# Altium PCB JUMP_PI.PcbDoc
Units mm, origin at the board's own origin, x right, y up, seen from the top; angles counter-clockwise.
Board outline 62.86 x 95.88 mm, 2 copper layers (Top Layer, Bottom Layer); 29 components, 34 nets, 129 pads, 4 vias.
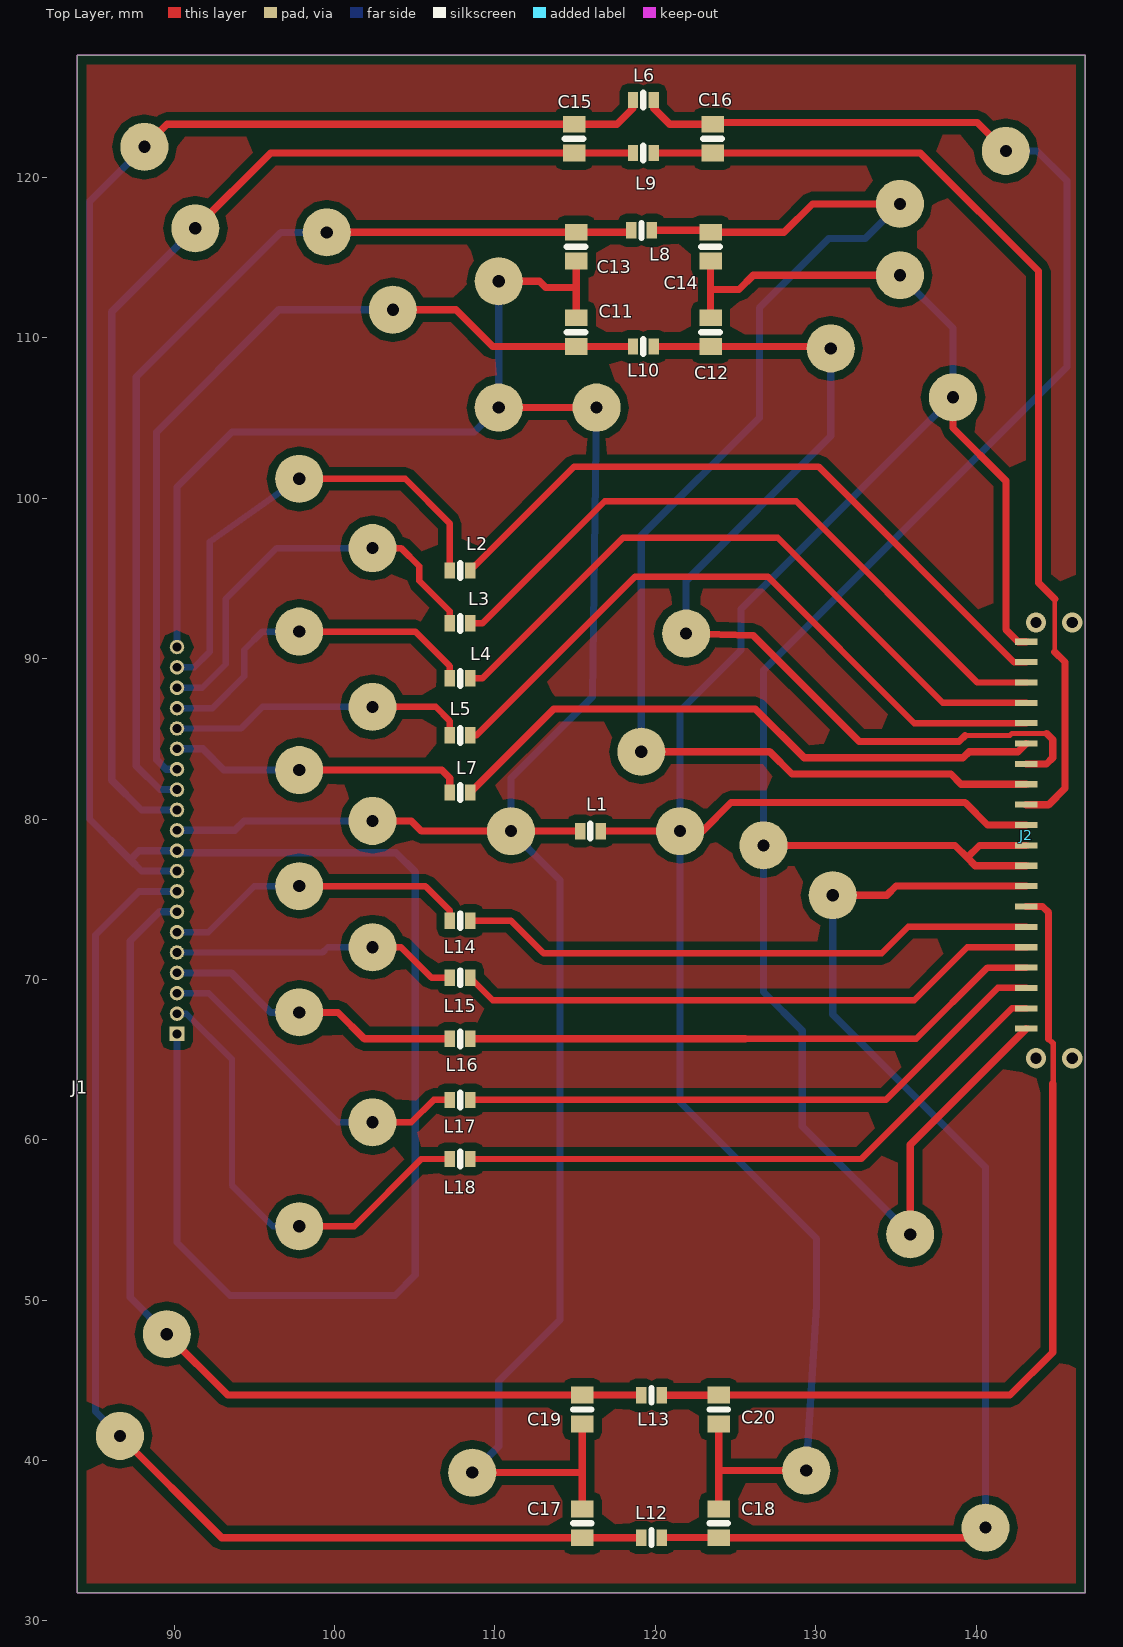
[diagram p0: Top Layer view]
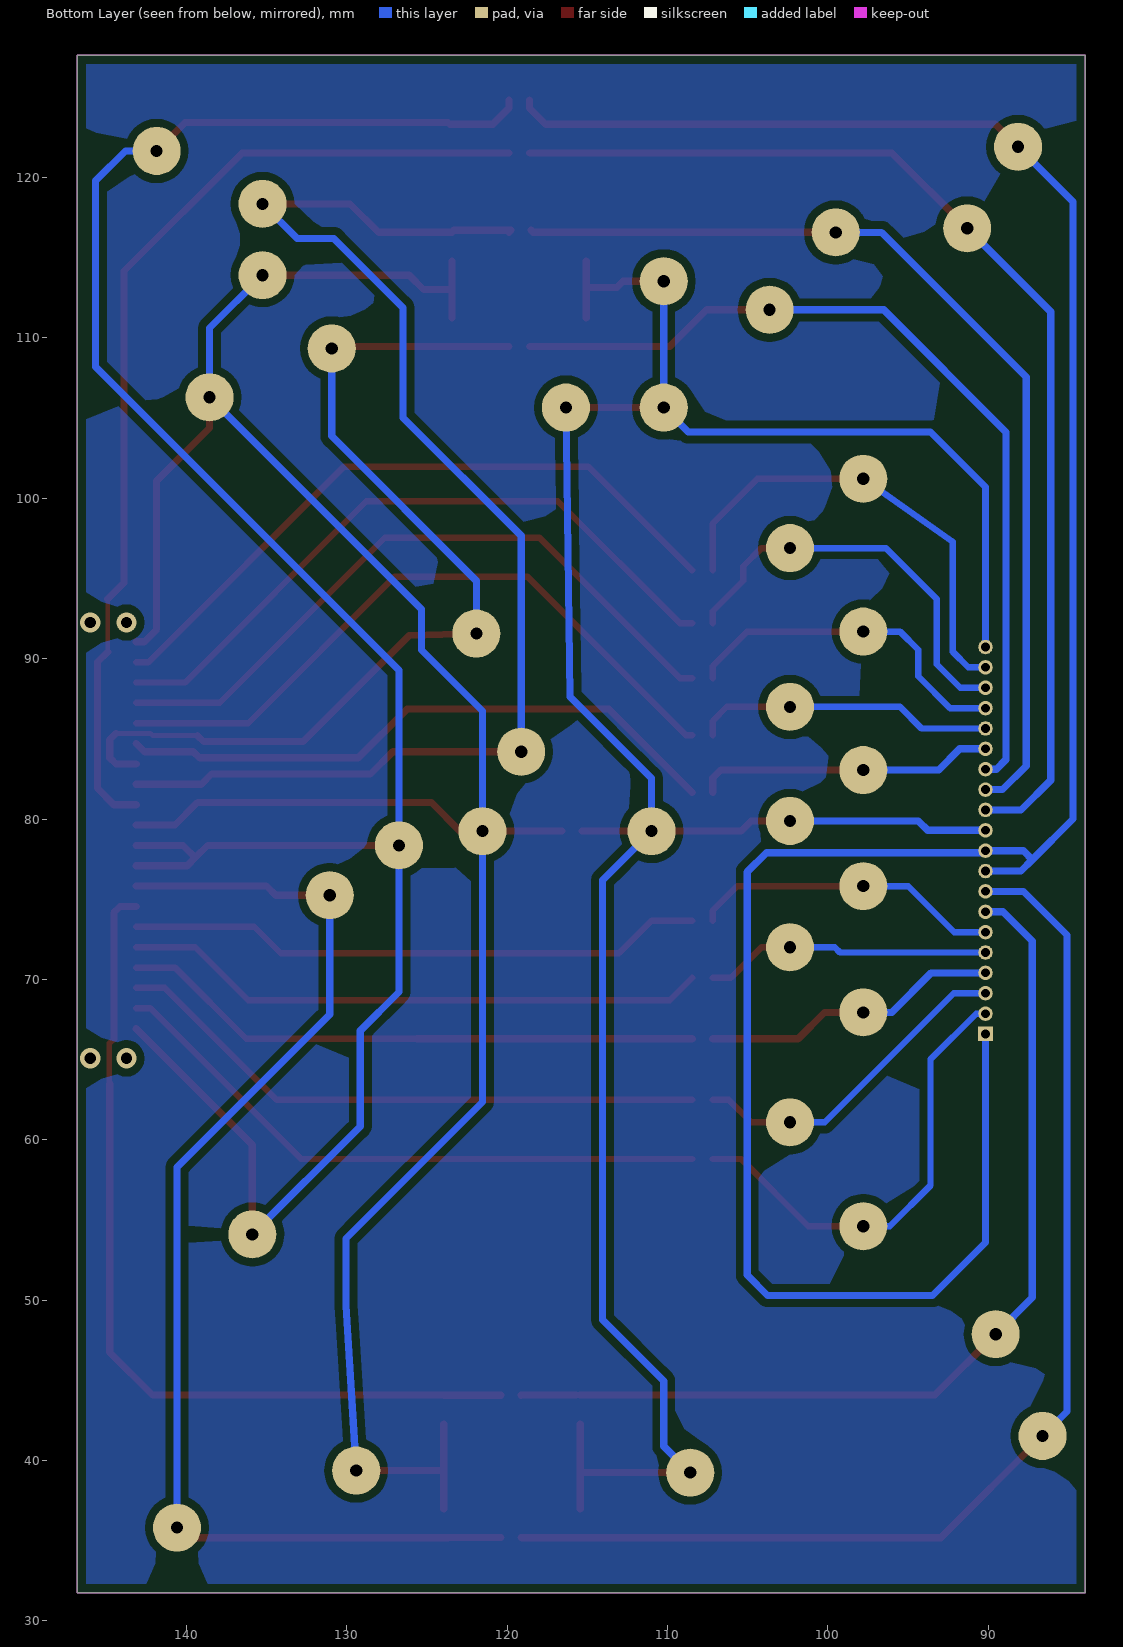
[diagram p1: Bottom Layer view, seen from below]
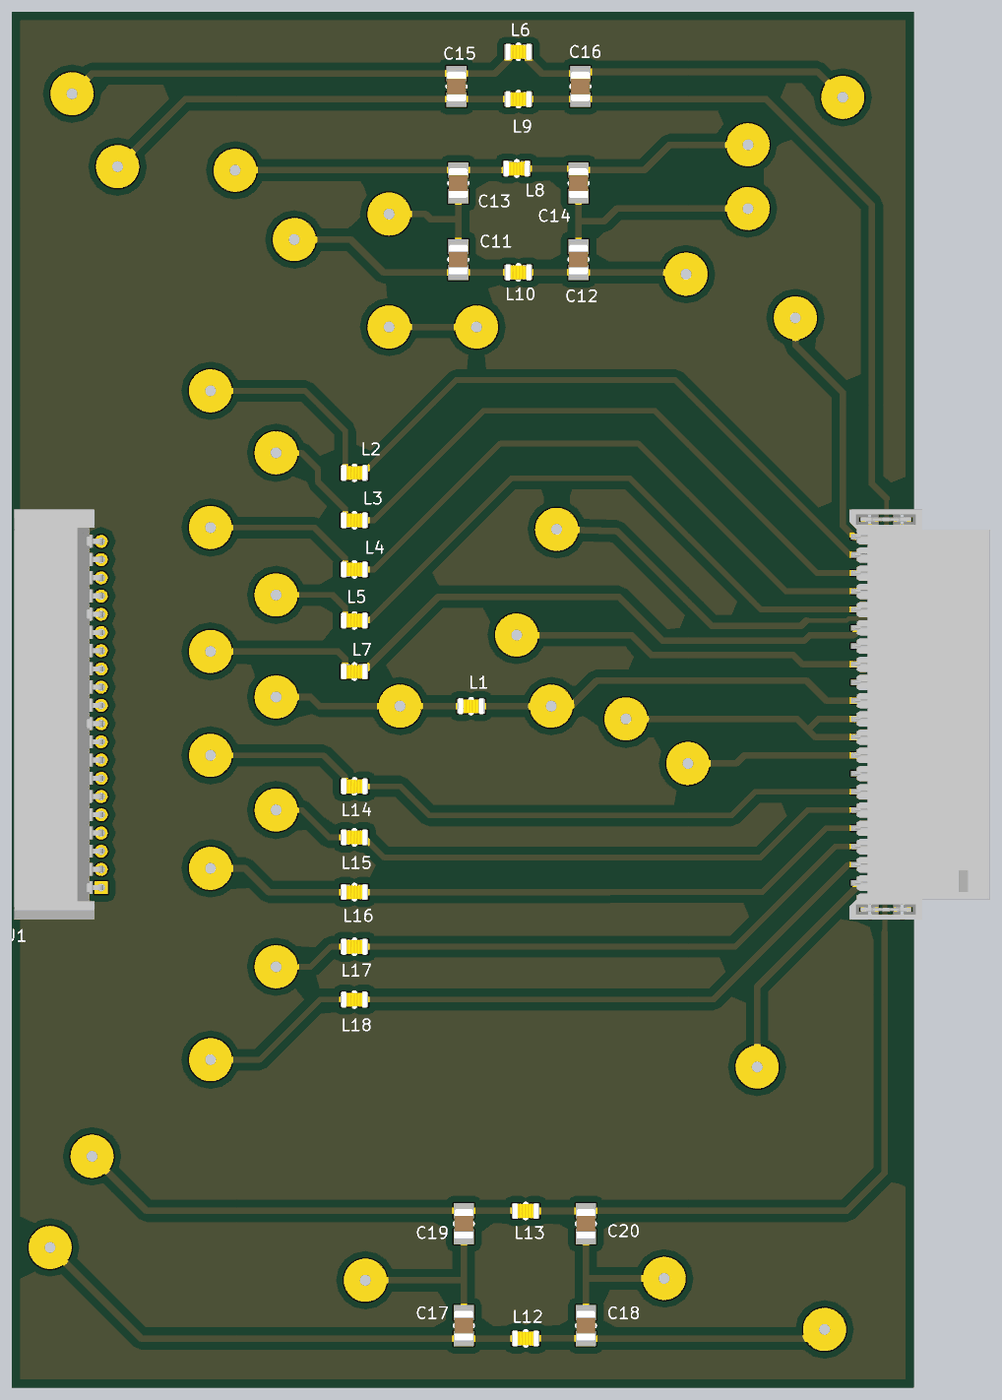
[diagram p2: 3D render of the assembled board from above, using the file's embedded part models]

## Layer stack, top to bottom
Top Solder: solder mask 0.0102, Solder Resist, Dk 3.5
Top Layer: signal copper 0.0356
Dielectric 1: dielectric 0.32, FR-4, Dk 4.8
Bottom Layer: signal copper 0.0356
Bottom Solder: solder mask 0.0102, Solder Resist, Dk 3.5

## Board outline
83.947,31.75 146.812,31.75 146.812,127.635 83.947,127.635

## Design rules (kind name [scope] priority, off if disabled: settings)
Clearance [All] p1: gap=0.254 ignorepadtopadclearanceinfootprint=FALSE except(0: Arc-Hole Track-Hole SMDPad-Hole THPad-Hole Via-Hole Fill-Hole Poly-Hole Region-Hole Text-Hole; 0.5: Arc-Fill Arc-Poly Arc-Region Track-Fill Track-Poly Track-Region SMDPad-Fill SMDPad-Poly SMDPad-Region THPad-Fill THPad-Poly THPad-Region Via-Fill Via-Poly Via-Region Fill-Fill Fill-Poly Fill-Region Poly-Poly Poly-Region Region-Region)
MinimumSolderMaskSliver [All] p1: minsoldermaskwidth=0.127
PolygonConnect [All] p1: connectstyle=Relief reliefconductorwidth=0.254 reliefentries=4 polygonreliefangle="90 Angle" airgapwidth=0.254
RoutingVias [All] p1: holewidth=0.711 width=1.27 viastyle="Through Hole" minholewidth=0.711 minwidth=1.27 maxholewidth=0.711 maxwidth=1.27
SilkToSolderMaskClearance [IsPad] p1: minsilkscreentomaskgap=0.07 clearancetoexposedcopper=TRUE
SolderMaskExpansion [All] p1: expansion=0.102
Width [All] p1: maxlimit=1 minlimit=0.1 preferedwidth=0.254 minimp=50.000000 maximp=50.000000 favimp=50.000000
28 further rules are at their usual default settings.

## Classes and differential pairs
component class JUMP_PI: C12 C13 C15 C16 C17 C18 C19 C20 J1 J2 L1 L2 L3 L4 L5 L6 L7 L8 L9 L12 L13 L14 L15 L16 L17 L18

## Components (designator, comment, footprint, x,y, rotation, side; value= is the part's Value field where it differs from the comment)
C11 "1.2nF" CAPC2012X135N 115.062,110.363 r270 top
C12 "1.2nF" CAPC2012X135N 123.444,110.363 r270 top
C13 "1.2nF" CAPC2012X135N 115.062,115.697 r90 top
C14 "1.2nF" CAPC2012X135N 123.444,115.697 r90 top
C15 "1.2nF" CAPC2012X135N 114.935,122.428 r270 top
C16 "1.2nF" CAPC2012X135N 123.571,122.428 r270 top
C17 "1.2nF" CAPC2012X135N 115.443,36.079 r270 top
C18 "1.2nF" CAPC2012X135N 123.952,36.079 r270 top
C19 "1.2nF" CAPC2012X135N 115.443,43.18 r90 top
C20 "1.2nF" CAPC2012X135N 123.952,43.18 r90 top
J1 "Header 20" SAMTEC_TFM-120-01-L-S-RA 89.69,78.669 r90 top
J2 "Header 20" SAMTEC_SFM-120-02-S-SH 144.099,78.669 r90 top
L1 "390nH" IND_ABRACON_AISC-0603 115.951,79.248 r0 top
L2 "390nH" IND_ABRACON_AISC-0603 107.823,95.504 r0 top
L3 "390nH" IND_ABRACON_AISC-0603 107.823,92.202 r0 top
L4 "390nH" IND_ABRACON_AISC-0603 107.823,88.773 r0 top
L5 "390nH" IND_ABRACON_AISC-0603 107.823,85.217 r0 top
L6 "390nH" IND_ABRACON_AISC-0603 119.253,124.841 r0 top
L7 "390nH" IND_ABRACON_AISC-0603 107.823,81.661 r0 top
L8 "390nH" IND_ABRACON_AISC-0603 119.137,116.713 r0 top
L9 "390nH" IND_ABRACON_AISC-0603 119.253,121.539 r0 top
L10 "390nH" IND_ABRACON_AISC-0603 119.253,109.474 r0 top
L12 "390nH" IND_ABRACON_AISC-0603 119.761,35.19 r0 top
L13 "390nH" IND_ABRACON_AISC-0603 119.761,44.069 r0 top
L14 "390nH" IND_ABRACON_AISC-0603 107.823,73.66 r0 top
L15 "390nH" IND_ABRACON_AISC-0603 107.823,70.104 r0 top
L16 "390nH" IND_ABRACON_AISC-0603 107.823,66.294 r0 top
L17 "390nH" IND_ABRACON_AISC-0603 107.823,62.484 r0 top
L18 "390nH" IND_ABRACON_AISC-0603 107.823,58.801 r0 top

## Footprints (in the part's own frame and the unit in brackets; to place one, negate y for a bottom-side part, rotate by r counter-clockwise, add the part's x,y. Pads: shape width x height; smd on the part's side, far side on the other; paste and mask are expansions set on the pad)
CAPC2012X135N [mm] "Chip Capacitor, Body 2.0x1.25mm, IPC Medium Density"
  rect 1.05x1.4 smd: 1(-0.9,0) 2(0.9,0)
  silkscreen extent 0,-0.58 0,0.58, body extent -1.05,-0.67 1.05,0.68, height 1.25
IND_ABRACON_AISC-0603 [mm] "Inductor, Molded Body; 1.8mm L X 1.12mm W, AISC-0603 Serie"
  rect 0.64x1.02 smd: 1(-0.64,0) 2(0.64,0)
  silkscreen extent 0,-0.45 0,0.45, body extent -0.9,-0.56 0.9,0.56, height 1
SAMTEC_SFM-120-02-S-SH [mm]
  rect 0.38x1.4 smd: 1(-11.74,0.97) 2(-10.47,0.97) 3(-9.2,0.97) 4(-7.93,0.97) 5(-6.66,0.97) 6(-5.39,0.97) 7(-4.12,0.97) 8(-2.85,0.97) 9(-1.58,0.97) 10(-0.31,0.97) 11(0.96,0.97) 12(2.23,0.97) 13(3.5,0.97) 14(4.77,0.97) 15(6.04,0.97) 16(7.31,0.97) 17(8.58,0.97) 18(9.85,0.97) 19(11.12,0.97) 20(12.39,0.97)
  body extent -14.29,-8 14.29,1.78, height 1.4
SAMTEC_TFM-120-01-L-S-RA [mm]
  rect 0.905x0.905 hole 0.54: 1(-12.07,-0.48)
  round 0.905 hole 0.54: 2(-10.8,-0.48) 3(-9.53,-0.48) 4(-8.26,-0.48) 5(-6.99,-0.48) 6(-5.72,-0.48) 7(-4.45,-0.48) 8(-3.18,-0.48) 9(-1.91,-0.48) 10(-0.64,-0.48) 11(0.63,-0.48) 12(1.9,-0.48) 13(3.17,-0.48) 14(4.44,-0.48) 15(5.71,-0.48) 16(6.98,-0.48) 17(8.25,-0.48) 18(9.52,-0.48) 19(10.79,-0.48) 20(12.06,-0.48)
  body extent -14.29,-0.63 14.29,5.59, height 4.46

## Part data
C11 C12 C13 C14 C15 C16 C17 C18 C19 C20: library part CC0805_1.2NF_50V_10%_X7R, "Non-polarised capacitor", Case=0805, Manufacturer=GENERIC, Manufacturer1 ComponentHeight=1.35mm, Manufacturer1 Example=PHYCOMP, Manufacturer1 Part Number=223858615624, Tolerance=±10%, Voltage=50V, Author="CERN DEM JLC", Component Type=Standard, CreateDate=03/12/2007, HelpURL=\\cern.ch\dfs\Applications\Altium\Datasheets\CC0805_X7R_PHYCOMP.pdf, LatestRevisionDate=03/12/2007, Manufacturer Part Number=CC0805_1.2NF_50V_10%_X7R, Mounted=Yes, Part Description="SMD Multilayer Chip Ceramic Capacitor", Part Number=CC0805_1.2NF_50V_10%_X7R, Pin Count=2, Sense=No, SMD=Yes, Socket=No, Status=Preferred, TC=X7R
J1: library part SAMTEC_TFM-120-01-L-S-RA, "Connector 20 Male", Manufacturer=SAMTEC, Manufacturer Part Number=TFM-120-01-L-S-RA, Author="LNLS DIG FCS", ComponentHeight=4.45mm, Component Type=Standard, CreateDate=30/06/2016, Family="Header 20", HelpURL=http://suddendocs.samtec.com/catalog_english/tfm.pdf, LatestRevisionDate=30/06/2016, Mounted=Yes, Part Description="20 Contacts - Pitch 1.27mm - Single Row Right Angle Header", Part Number=SAMTEC_TFM-120-01-L-S-RA, Pin Count=20, PressFit=No, Sense=No, SMD=No, Socket=No, Status=None
J2: library part SAMTEC_SFM-120-02-S-SH, "Connector 20 Female", Manufacturer=SAMTEC, Manufacturer Part Number=SFM-120-02-S-SH, Author="LNLS DIG FCS", ComponentHeight=2.41mm, Component Type=Standard, CreateDate=06/07/2016, Family="Header 20", HelpURL=http://suddendocs.samtec.com/catalog_english/sfm.pdf, LatestRevisionDate=06/07/2016, Mounted=Yes, Part Description="20 Contacts - Pitch 1.27mm - Single Row Right Angle Header", Part Number=SAMTEC_SFM-120-02-S-SH, Pin Count=20, PressFit=No, Sense=No, SMD=Yes, Socket=No, Status=None
L1 L2 L3 L4 L5 L6 L7 L8 L9 L10 L12 L13 L14 L15 L16 L17 L18: library part IND_390NH_5%_ABRACON_AISC-0603, "Inductor", Case=0603, Manufacturer=ABRACON, Manufacturer Part Number=AISC-0603-R39-J, Power=120mA, Resistance=2.9R, Tolerance=±5%, Author="CERN DEM JLC", ComponentHeight=1.02mm, Component Type=Standard, CreateDate=23/09/2010, HelpURL=\\cern.ch\dfs\Applications\Altium\Datasheets\IND_ABRACON_AISC-0603.pdf, LatestRevisionDate=23/09/2010, Mounted=Yes, Part Description="SMD Ceramic Wire-Wound Chip Inductor", Part Number=IND_390NH_5%_ABRACON_AISC-0603, Pin Count=2, Sense=No, SMD=Yes, Socket=No, Status=None

## Free pads (board coordinates)
  round 3 hole 0.762: 3(108.585,39.243) 4(119.126,84.201) 4(121.539,79.248) 4(121.92,91.567) 4(126.746,78.359) 4(129.413,39.37) 4(130.937,109.347) 4(131.064,75.253) 4(135.255,113.919) 4(135.255,118.364) 4(135.89,54.102) 4(138.557,106.299) 4(140.589,35.814) 4(141.859,121.666) 5(110.236,113.538) 5(110.998,79.248) 5(116.332,105.664) 6(86.614,41.529) 6(88.138,121.92) 6(89.535,47.879) 6(91.313,116.84) 6(97.79,54.61) 6(97.79,67.945) 6(97.79,75.819) 6(97.79,83.058) 6(97.79,91.694) 6(97.79,101.219) 6(99.508,116.586) 6(102.362,61.087) 6(102.362,72.009) 6(102.362,79.883) 6(102.362,86.995) 6(102.362,96.901) 6(103.632,111.76) 6(110.236,105.664)

## Via types
v1: diameter 1.27, hole 0.711, Top Layer to Bottom Layer, 4 vias

## Nets (pads, with @x,y where several pads share a name; then routed paths per layer and width w, separated by ;. In a path a pad name is that pad's centre, name@x,y a point inside that pad or via, vN(x,y) a via of type N, cw(c..) or ccw(c..) an arc to the next point about the centre after c; other vN are vias at no path point)
+3V_RFFE: C20.2 J2.7 L13.2 | length 54.6
  Top Layer w0.35: 144.526,66.294 144.803,66.017 144.803,63.523 144.78,63.5
  Top Layer w0.45: L13.2 123.941,44.069 C20.2 142.124,44.08 144.78,46.736 144.78,63.5 ; J2.7 144.145,74.549 144.526,74.168 144.526,66.294
+3VRF_CON: C19.2 J1.7 L13.1 pad.6@89.535,47.879 | length 60
  Top Layer w0.45: pad.6@89.535,47.879 93.334,44.08 C19.2 ; C19.2@115.697,44.08 119.11,44.08 L13.1
  Bottom Layer w0.45: pad.6@89.535,47.879 87.249,50.165 87.249,72.39 89.078,74.219 J1.7
+5V_RFFE: C12.2 J2.14 L10.2 pad.4@121.92,91.567 pad.4@130.937,109.347 | length 61.5
  Top Layer w0.3: 139.319,85.217 142.113,85.217 142.24,85.344 144.399,85.344
  Top Layer w0.45: L10.2 123.433,109.474 C12.2 pad.4@130.937,109.463 ; pad.4@121.92,91.567 126.111,91.44 132.715,84.836 138.938,84.836 139.319,85.217 ; J2.14 144.399,83.439 144.78,83.82 144.78,84.963 144.399,85.344
  Bottom Layer w0.45: pad.4@121.92,91.567 121.92,94.869 130.937,103.886 pad.4@130.937,109.347
+5VD_CON: C15.2 J1.12 L9.1 pad.6@91.313,116.84 | length 70.7
  Top Layer w0.45: pad.6@91.313,116.84 96.001,121.528 C15.2 114.946,121.539 L9.1
  Bottom Layer w0.45: J1.12 87.96,80.569 86.106,82.423 86.106,111.633 pad.6@91.313,116.84
+5VD_RFFE: C16.2 J2.12 L9.2 | length 62.8
  Top Layer w0.3: 144.907,90.424 144.907,93.726
  Top Layer w0.45: L9.2 123.56,121.539 C16.2 136.536,121.528 143.891,114.173 143.891,94.742 144.907,93.726 ; J2.12 144.526,80.899 145.542,81.915 145.542,89.789 144.907,90.424
+5VRF_CON: C11.2 J1.14 L10.1 pad.6@103.632,111.76 | length 55.8
  Top Layer w0.45: pad.6@103.632,111.76 107.569,111.76 109.866,109.463 C11.2 115.073,109.474 L10.1
  Bottom Layer w0.45: J1.14 89.484,83.109 88.9,83.693 88.9,104.14 96.52,111.76 pad.6@103.632,111.76
A+5V_CON: C13.2 J1.13 L8.1 pad.6@99.508,116.586 | length 62.1
  Top Layer w0.45: pad.6@99.508,116.586 99.519,116.597 C13.2 118.381,116.597 L8.1
  Bottom Layer w0.45: J1.13 89.103,81.839 87.63,83.312 87.63,107.569 96.647,116.586 pad.6@99.508,116.586
A+5V_RFFE: C14.2 J2.13 L8.2 pad.4@119.126,84.201 pad.4@135.255,118.364 | length 83.4
  Top Layer w0.45: pad.4@119.126,84.201 127.127,84.201 128.524,82.804 138.43,82.804 139.065,82.169 J2.13 ; L8.2@119.893,116.597 L8.2 123.328,116.713 C14.2 128.027,116.597 129.794,118.364 pad.4@135.255,118.364
  Bottom Layer w0.45: pad.4@119.126,84.201 119.126,97.663 126.492,105.029 126.492,111.887 130.81,116.205 133.096,116.205 pad.4@135.255,118.364
AGND_CON: C15.1 J1.1 J1.9 J1.10 L6.1 pad.6@88.138,121.92 | length 155.7
  Top Layer w0.45: pad.6@88.138,121.92 89.546,123.328 C15.1 117.613,123.328 118.613,124.328 L6.1
  Bottom Layer w0.45: pad.6@88.138,121.92 84.709,118.491 84.709,80.01 87.249,77.47 ; J1.1 90.17,53.594 93.472,50.292 103.759,50.292 105.029,51.562 105.029,76.708 103.833,77.904 90.17,77.904 J1.10 87.808,78.029 87.249,77.47 ; J1.9 87.96,76.759 87.249,77.47
C+5V_CON: C17.2 J1.8 L12.1 pad.6@86.614,41.529 | length 73.2
  Top Layer w0.45: pad.6@86.614,41.529 92.964,35.179 C17.2 119.11,35.179 L12.1
  Bottom Layer w0.45: pad.6@86.614,41.529 85.09,43.053 85.09,72.771 87.808,75.489 J1.8
C+5V_RFFE: C18.2 J2.8 L12.2 pad.4@131.064,75.253 pad.4@140.589,35.814 | length 76.1
  Top Layer w0.45: L12.2 123.687,35.19 123.698,35.179 C18.2 139.954,35.179 pad.4@140.589,35.814 ; pad.4@131.064,75.253 134.435,75.253 135.001,75.819 J2.8
  Bottom Layer w0.45: pad.4@131.064,75.253 131.064,67.818 140.589,58.293 pad.4@140.589,35.814
CLK_CON: J1.5 L15.1 pad.6@102.362,72.009 | length 17.9
  Top Layer w0.4: pad.6@102.362,72.009 104.14,72.009 106.045,70.104 L15.1
  Bottom Layer w0.4: J1.5 99.238,71.679 99.568,72.009 pad.6@102.362,72.009
CLK_RFFE: J2.5 L15.2 | length 36.6
  Top Layer w0.4: L15.2 109.86,68.707 136.144,68.707 139.446,72.009 J2.5
CS1_RFFE: J2.16 L5.2 | length 42.6
  Top Layer w0.4: L5.2 108.839,85.217 118.745,95.123 127,95.123 136.144,85.979 J2.16
CSAC_CON: J1.16 L5.1 pad.6@102.362,86.995 | length 18.8
  Top Layer w0.4: pad.6@102.362,86.995 106.299,86.995 107.183,86.111 L5.1
  Bottom Layer w0.4: J1.16 94.158,85.649 95.504,86.995 pad.6@102.362,86.995
DATAA_CON: J1.3 L17.1 pad.6@102.362,61.087 | length 20.9
  Top Layer w0.4: pad.6@102.362,61.087 104.775,61.087 106.172,62.484 L17.1
  Bottom Layer w0.4: J1.3 92.151,69.139 100.203,61.087 pad.6@102.362,61.087
DATAA_RFFE: J2.3 L17.2 | length 37.6
  Top Layer w0.4: L17.2 134.366,62.484 141.351,69.469 J2.3
DATAC_CON: J1.2 L18.1 pad.6@97.79,54.61 | length 28.9
  Top Layer w0.4: pad.6@97.79,54.61 101.219,54.61 105.41,58.801 L18.1
  Bottom Layer w0.4: J1.2 90.754,67.869 93.599,65.024 93.599,57.15 96.139,54.61 pad.6@97.79,54.61
DATAC_RFFE: J2.2 L18.2 | length 38.6
  Top Layer w0.4: L18.2 132.842,58.801 142.24,68.199 J2.2
DIN_RFFE: J2.17 L4.2 | length 42.6
  Top Layer w0.4: L4.2 109.22,88.773 117.983,97.536 127.635,97.536 137.922,87.249 J2.17
DOUT_RFFE: J2.18 L3.2 | length 42.5
  Top Layer w0.4: L3.2 109.22,92.202 116.84,99.822 128.778,99.822 140.081,88.519 J2.18
HEAT_RFFE: J2.15 L7.2 | length 38.5
  Top Layer w0.45: L7.2 113.67,86.868 126.238,86.868 129.286,83.82 139.192,83.82 139.573,84.201 142.621,84.201 J2.15
HEATAC_CON: J1.15 L7.1 pad.6@97.79,83.058 | length 18.7
  Top Layer w0.45: pad.6@97.79,83.058 106.68,83.058 107.183,82.555 L7.1
  Bottom Layer w0.45: J1.15 91.77,84.379 93.091,83.058 pad.6@97.79,83.058
LE_CON: J1.6 L14.1 pad.6@97.79,75.819 | length 19.5
  Top Layer w0.4: pad.6@97.79,75.819 105.664,75.819 107.183,74.3 L14.1
  Bottom Layer w0.4: J1.6 92.126,72.949 94.996,75.819 pad.6@97.79,75.819
LE_RFFE: J2.6 L14.2 | length 36.2
  Top Layer w0.4: L14.2 110.998,73.66 113.03,71.628 134.112,71.628 135.763,73.279 J2.6
MISO1_CON: J1.18 L3.1 pad.6@102.362,96.901 | length 25.9
  Top Layer w0.4: pad.6@102.362,96.901 104.14,96.901 105.283,95.758 105.283,94.869 107.183,92.969 L3.1
  Bottom Layer w0.4: J1.18 91.745,88.189 93.218,89.662 93.218,93.726 96.393,96.901 pad.6@102.362,96.901
MOSI1_CON: J1.17 L4.1 pad.6@97.79,91.694 | length 21.6
  Top Layer w0.4: pad.6@97.79,91.694 105.029,91.694 107.183,89.54 L4.1
  Bottom Layer w0.4: J1.17 92.38,86.919 94.361,88.9 94.361,90.551 95.504,91.694 pad.6@97.79,91.694
RFGND_CON: C11.1 C13.1 C17.1 C19.1 J1.11 J1.20 L1.1 pad.3 pad.5 pad.6@102.362,79.883 pad.6@110.236,105.664 | length 164.4
  Top Layer w0.45: pad.6@102.362,79.883 104.775,79.883 105.41,79.248 110.998,79.248 L1.1 ; pad.3 115.443,39.243 ; pad.6@110.236,105.664 pad.5@116.332,105.664 ; pad.5@110.236,113.538 112.776,113.538 113.157,113.157 115.062,113.157 ; C11.1 115.062,113.157 ; C13.1 115.062,113.157 ; C17.1 115.443,38.862 C19.1
  Bottom Layer w0.45: J1.11 93.777,79.299 94.361,79.883 pad.6@102.362,79.883 ; J1.20 90.17,100.711 93.599,104.14 108.712,104.14 110.236,105.664 pad.5@110.236,113.538 ; pad.3 110.236,40.894 110.236,44.958 114.046,48.768 114.046,76.2 110.998,79.248 110.998,82.55 116.078,87.63 pad.5@116.332,105.664
RFGND_RFFE: C12.1 C14.1 C18.1 C20.1 J2.11 J2.20 L1.2 pad.4@121.539,79.248 pad.4@129.413,39.37 pad.4@135.255,113.919 pad.4@138.557,106.299 | length 158.3
  Top Layer w0.45: L1.2 121.539,79.248 122.936,79.248 124.714,81.026 139.319,81.026 140.716,79.629 J2.11 ; C12.1 123.444,113.03 ; C14.1 123.444,113.03 ; C18.1 C20.1 ; 123.952,39.37 pad.4@129.413,39.37 ; pad.4@135.255,113.919 126.111,113.919 125.222,113.03 123.444,113.03 ; pad.4@138.557,106.299 138.557,104.394 141.859,101.092 141.859,91.821 142.621,91.059 J2.20
  Bottom Layer w0.45: pad.4@129.413,39.37 130.048,49.657 130.048,53.848 121.539,62.357 121.539,79.248 121.539,86.741 125.349,90.551 125.349,93.091 138.557,106.299 138.557,110.617 pad.4@135.255,113.919
SCK1_CON: J1.19 L2.1 pad.6@97.79,101.219 | length 29.6
  Top Layer w0.4: pad.6@97.79,101.219 104.394,101.219 107.183,98.43 L2.1
  Bottom Layer w0.4: J1.19 91.237,89.459 92.202,90.424 92.202,97.282 pad.6@97.79,101.219
SCLK_RFFE: J2.19 L2.2 | length 42.4
  Top Layer w0.4: L2.2 114.94,101.981 130.175,101.981 142.367,89.789 J2.19
TGND_RFFE: C16.1 J2.1 J2.9 J2.10 L6.2 pad.4@126.746,78.359 pad.4@135.89,54.102 pad.4@141.859,121.666 | length 142.3
  Top Layer w0.45: L6.2 119.893,124.328 120.893,123.328 C16.1 123.687,123.444 140.081,123.444 pad.4@141.859,121.666 ; pad.4@126.746,78.359 138.684,78.359 139.446,77.597 ; pad.4@135.89,54.102 135.89,59.69 J2.1 ; J2.9 139.954,77.089 139.446,77.597 ; J2.10 140.208,78.359 139.446,77.597
  Bottom Layer w0.45: pad.4@135.89,54.102 129.159,60.833 129.159,66.802 126.746,69.215 126.746,78.359 126.746,89.281 145.669,108.204 145.669,119.801 143.804,121.666 pad.4@141.859,121.666
VAC_CON: J1.4 L16.1 pad.6@97.79,67.945 | length 18.7
  Top Layer w0.45: pad.6@97.79,67.945 100.203,67.945 101.854,66.294 L16.1
  Bottom Layer w0.45: J1.4 93.548,70.409 96.012,67.945 pad.6@97.79,67.945
VAC_RFFE: J2.4 L16.2 | length 36.5
  Top Layer w0.4: 125.603,66.294 136.271,66.294 140.716,70.739 J2.4
  Top Layer w0.45: L16.2 125.603,66.294
copper on no net:
  other v1: 143.739,65.079 145.989,65.079 143.739,92.259 145.989,92.259

## Polygon pours and split planes (outlines as drawn)
no net on Bottom Layer "Top Layer-No Net" (solid, pour order 10): 83.947,127.635 146.812,127.635 146.812,31.75 83.947,31.75
no net on Top Layer "Top Layer-No Net" (solid, pour order 8): 146.812,127.635 146.812,31.75 83.947,31.75 83.947,127.635

## Keep-outs
Keep-Out Layer:
  the board outline again, w0.1